# EAGLE board dhunter_crazyDimensioning (EAGLE 6.4)
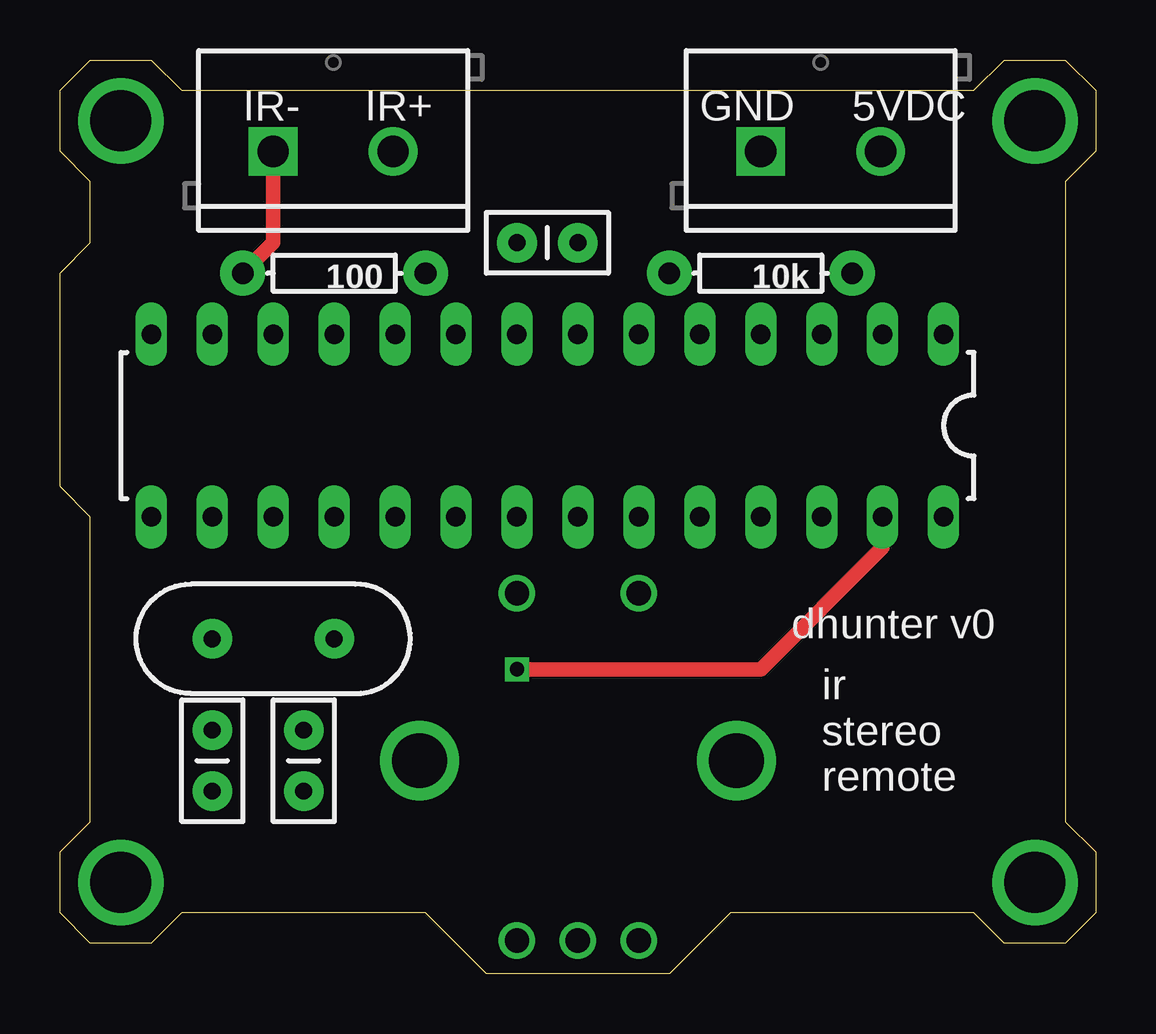
[diagram p0: board, top side]
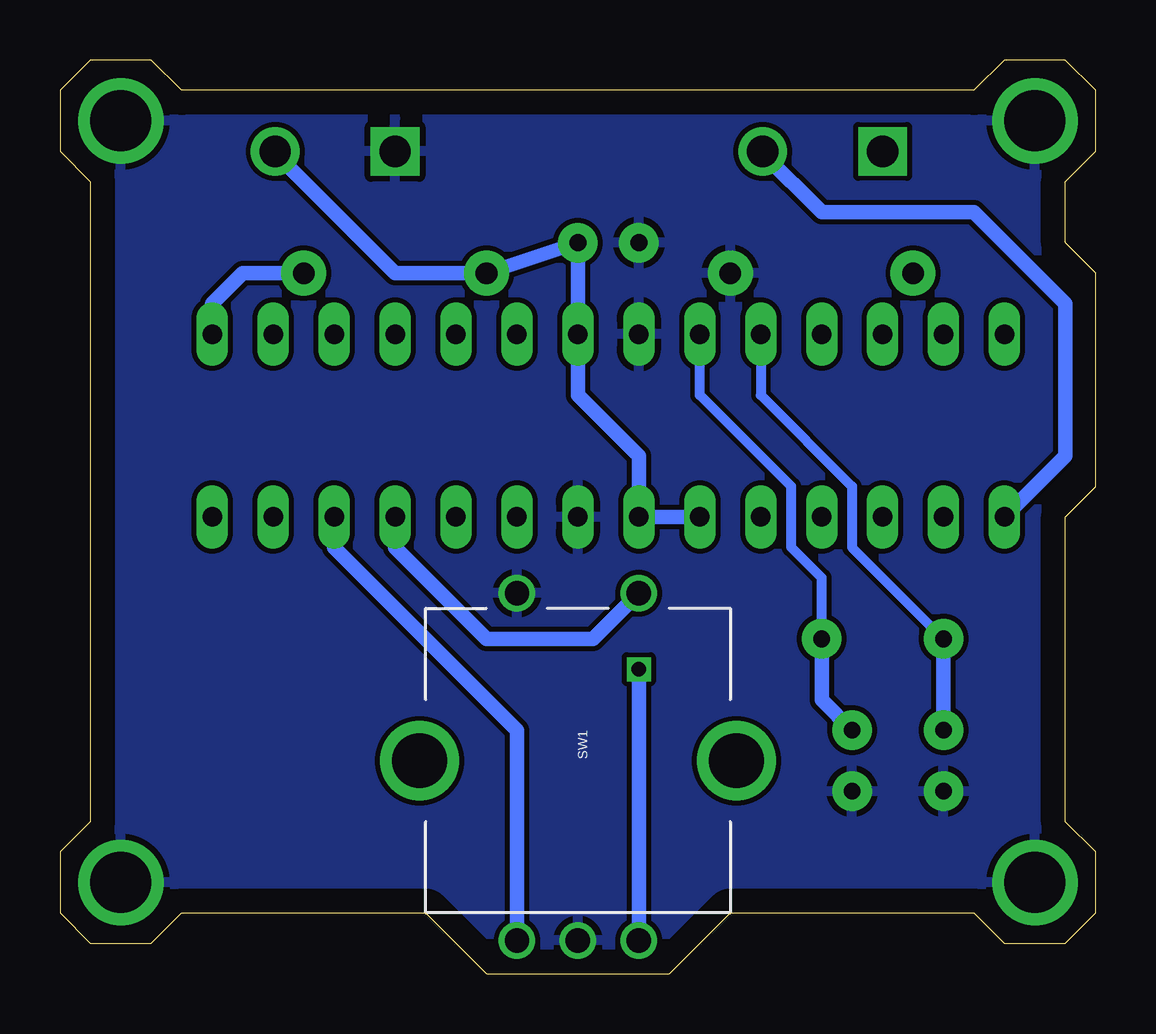
[diagram p1: board, bottom side, seen from below]

Size 43.18 x 38.1 mm. Coordinates in mm from the lower left corner, seen from the top.
Outline: 0,36.83 1.27,38.1 3.81,38.1 5.08,36.83 38.1,36.83 39.37,38.1 41.91,38.1 43.18,36.83 43.18,34.29 41.91,33.02 41.91,6.35 43.18,5.08 43.18,2.54 41.91,1.27 39.37,1.27 38.1,2.54 27.94,2.54 25.4,0 17.78,0 15.24,2.54 5.08,2.54 3.81,1.27 1.27,1.27 0,2.54 0,5.08 1.27,6.35 1.27,19.05 0,20.32 0,29.21 1.27,30.48 1.27,33.02 0,34.29 0,36.83
Copper layers (1*16): Top 0.035mm / dielectric 1.5mm / Bottom 0.035mm
Design rules "default": minimum track width 10mil, minimum drill 24mil, track to track 8mil, track to pad 8mil, pad to pad 8mil, via to via 8mil, smd to smd 8mil, copper to edge 40mil, drill to drill 8mil, minimum pad ring 10mil, minimum via ring 8mil, stop-mask expansion 4mil, vias tented up to drill 0mil, thermal gap 10mil

## Footprints (pad centres in the part's own frame; a part is rotated, then mirrored left to right if it is on the bottom)
CAP-PTH-SMALLEZ = drill 0.7 pad 1.651: 1 0,0; 2 2.54,0
SIMPLE_HOLE = drill 2.54 pad 3.048: P$1 0,0
SCREWTERMINAL-5MM-2 = drill 1.3 pad 2.032 square: 1 0,0 | drill 1.3 pad 2.032: 2 5,0
AXIAL-0.3EZ = drill 0.9 pad 1.88: P$1 -3.81,0; P$2 3.81,0
ROTARY_ENC_PLAIN = drill 1.016: A 7.493,-2.54; B 7.493,2.54; C 7.493,0; SW+ -6.985,2.54; SW- -6.985,-2.54 | drill 2.286: P$3 0,6.604; P$4 0,-6.604
DIL28-3 = drill 0.813 long: 1 -16.51,-3.81; 2 -13.97,-3.81; 3 -11.43,-3.81; 4 -8.89,-3.81; 5 -6.35,-3.81; 6 -3.81,-3.81; 7 -1.27,-3.81; 8 1.27,-3.81; 9 3.81,-3.81; 10 6.35,-3.81; 11 8.89,-3.81; 12 11.43,-3.81; 13 13.97,-3.81; 14 16.51,-3.81; 15 16.51,3.81; 16 13.97,3.81; 17 11.43,3.81; 18 8.89,3.81; 19 6.35,3.81; 20 3.81,3.81; 21 1.27,3.81; 22 -1.27,3.81; 23 -3.81,3.81; 24 -6.35,3.81; 25 -8.89,3.81; 26 -11.43,3.81; 27 -13.97,3.81; 28 -16.51,3.81
HC49US = drill 0.7 pad 1.651: 1 -2.54,0; 2 2.54,0

## Placement (x,y rotation side)
C1  22pF  [CAP-PTH-SMALLEZ]  6.35,7.62 90 top
C2  22pF  [CAP-PTH-SMALLEZ]  10.16,7.62 90 top
C3  100uF  [CAP-PTH-SMALLEZ]  21.59,30.48 180 top
H1  SEW_HOLE  [SIMPLE_HOLE]  2.54,3.81 0 top
H2  SEW_HOLE  [SIMPLE_HOLE]  2.54,35.56 0 top
H3  SEW_HOLE  [SIMPLE_HOLE]  40.64,3.81 0 top
H4  SEW_HOLE  [SIMPLE_HOLE]  40.64,35.56 0 top
JP1  M025MM  [SCREWTERMINAL-5MM-2]  8.89,34.29 0 top
JP2  M025MM  [SCREWTERMINAL-5MM-2]  29.21,34.29 0 top
R1  100  [AXIAL-0.3EZ]  11.43,29.21 180 top
R2  10k  [AXIAL-0.3EZ]  29.21,29.21 180 top
SW1  ROTARTY_ENCODER  [ROTARY_ENC_PLAIN]  21.59,8.89 270 bottom
U1  ATMEGA_328  [DIL28-3]  20.32,22.86 180 top
Y1  [HC49US]  8.89,13.97 180 top

## Library data of the parts
C1-C3 = SparkFun-Capacitors
H1-H4 = LilyPad-Wearables
JP1 JP2 = SparkFun-Connectors
R1 R2 = SparkFun-Passives
SW1 = SparkFun-Electromechanical
U1 = SparkFun-DigitalIC
Y1 = SparkFun-FreqCtrl

## Nets
GND: C1.1 C2.1 C3.2 H1.P$1 H2.P$1 H3.P$1 H4.P$1 JP2.1 R1.P$1 SW1.C SW1.SW- U1.8 U1.22
N$2: SW1.SW+ U1.25
N$5: C1.2 U1.10 Y1.2
N$6: C2.2 U1.9 Y1.1
N$7: JP1.2 U1.15
N$8: JP1.1 R1.P$2
N$9: R2.P$1 U1.1
ROTA: SW1.A U1.26
ROTB: SW1.B U1.27
VCC: C3.1 JP2.2 R2.P$2 U1.7 U1.20 U1.21

## Tracks (layer width: path | path; a pad name or v marks a point on that pad's centre or on a via)
GND
  pour Bottom: 0,38.1 0,0 43.18,0 43.18,38.1
N$2
  Bottom 0.61: U1.25 29.21,17.78 25.4,13.97 20.96,13.97 SW1.SW+
N$5
  Bottom 0.406: U1.10 13.97,24.13 10.16,20.32 10.16,17.78 Y1.2
  Bottom 0.61: C1.2 Y1.2
N$6
  Bottom 0.406: Y1.1 11.43,16.51 12.7,17.78 12.7,20.32 16.51,24.13 U1.9
  Bottom 0.61: C2.2 11.43,11.43 Y1.1
N$7
  Bottom 0.61: JP1.2 13.89,34.21 11.43,31.75 5.08,31.75 1.27,27.94 1.27,21.59 U1.15
N$8
  Top 0.61: JP1.1 8.89,30.48 R1.P$2
N$9
  Bottom 0.61: R2.P$1 35.56,29.21 36.83,27.94 U1.1
ROTA
  Bottom 0.61: SW1.A 24.13,10.16 31.75,17.78 U1.26
ROTB  (via drill 0.6)
  Top 0.61: v19.05,12.7 29.21,12.7 34.29,17.78 U1.27
  Bottom 0.61: SW1.B v19.05,12.7
VCC
  Bottom 0.61: U1.7 C3.1 R2.P$2 29.21,29.21 34.21,34.21 JP2.2 | U1.7 21.59,25.4 | U1.7 21.59,24.13 19.05,21.59 U1.21 U1.20

## Text on the board
tNames: IR- | IR+ | GND | 5VDC | dhunter v0 | ir / stereo / remote